# Altium PCB Driver2.PcbDoc
Units mm, origin at the board's own origin, x right, y up, seen from the top; angles counter-clockwise.
Board outline 113.95 x 149.85 mm, 2 copper layers (Top Layer, Bottom Layer); 43 components, 82 nets, 197 pads, 0 vias.
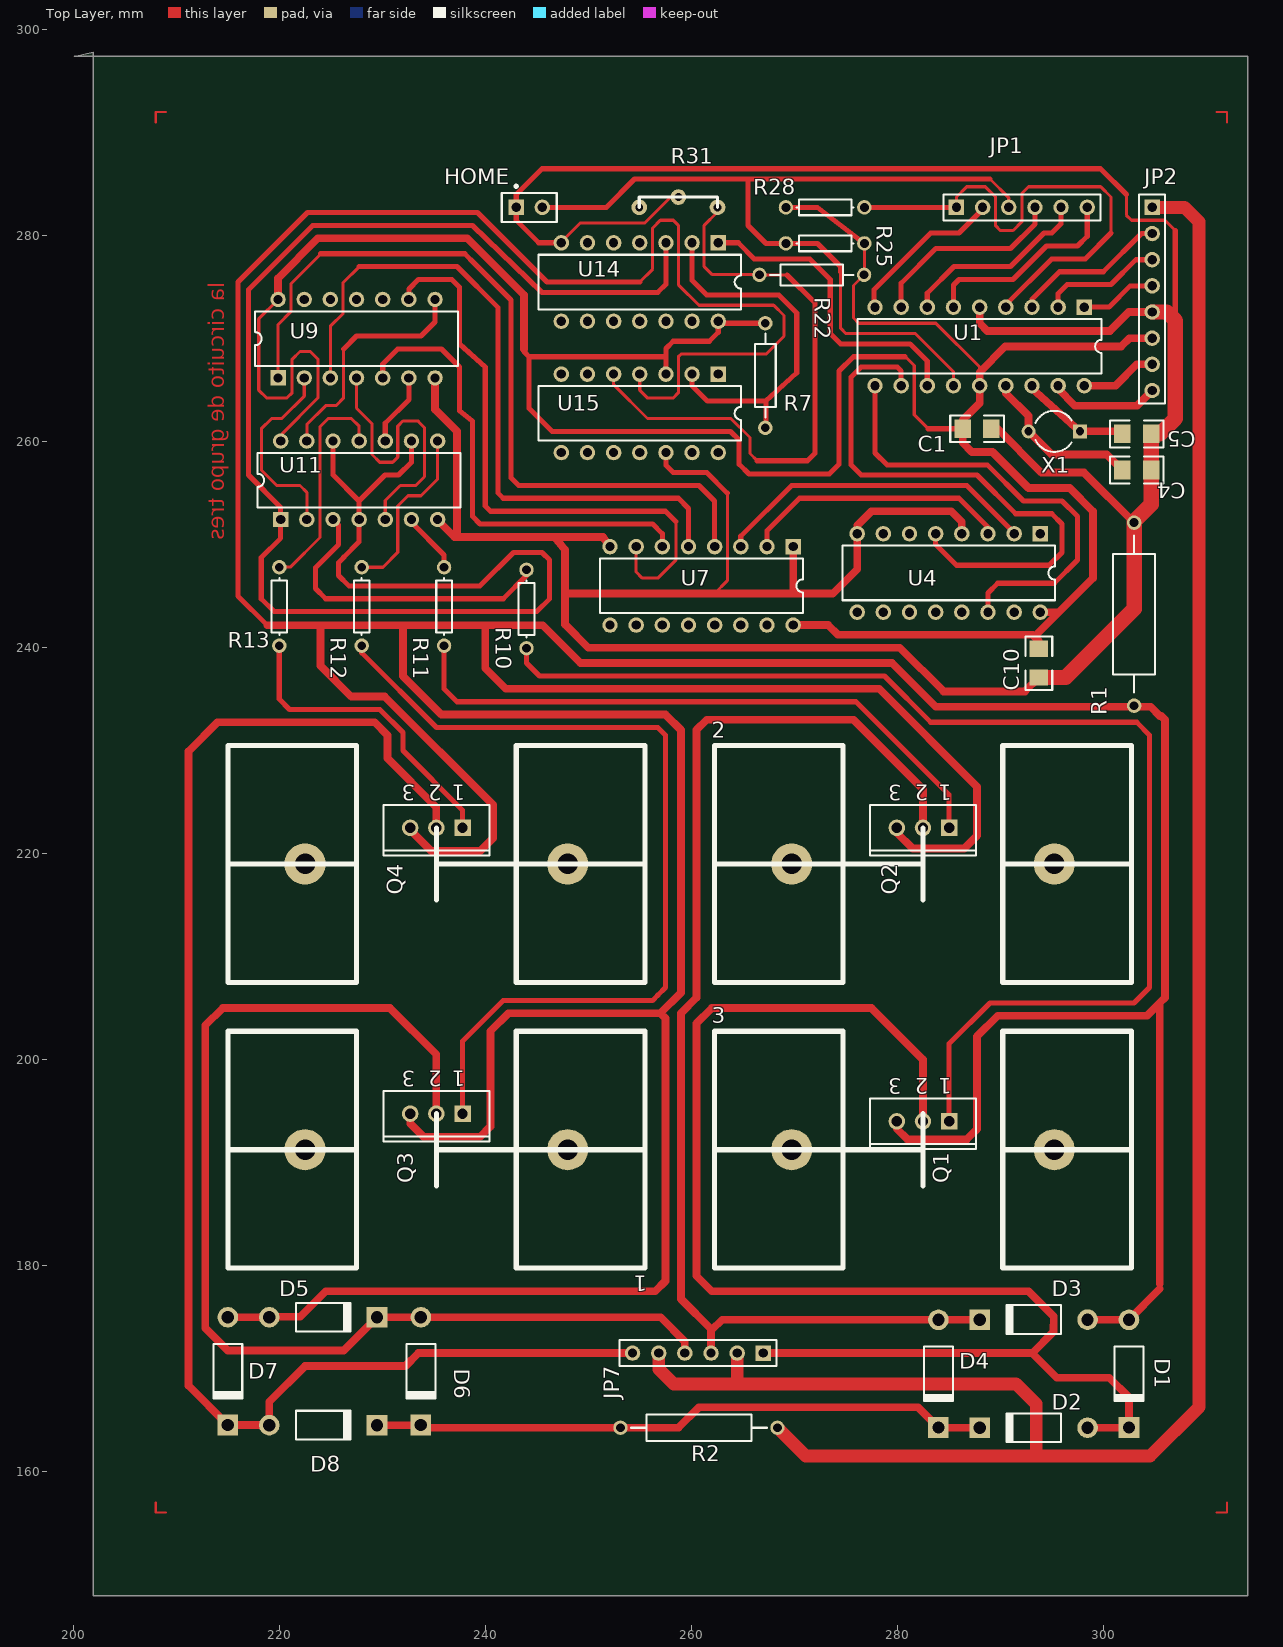
[diagram p0: Top Layer view]
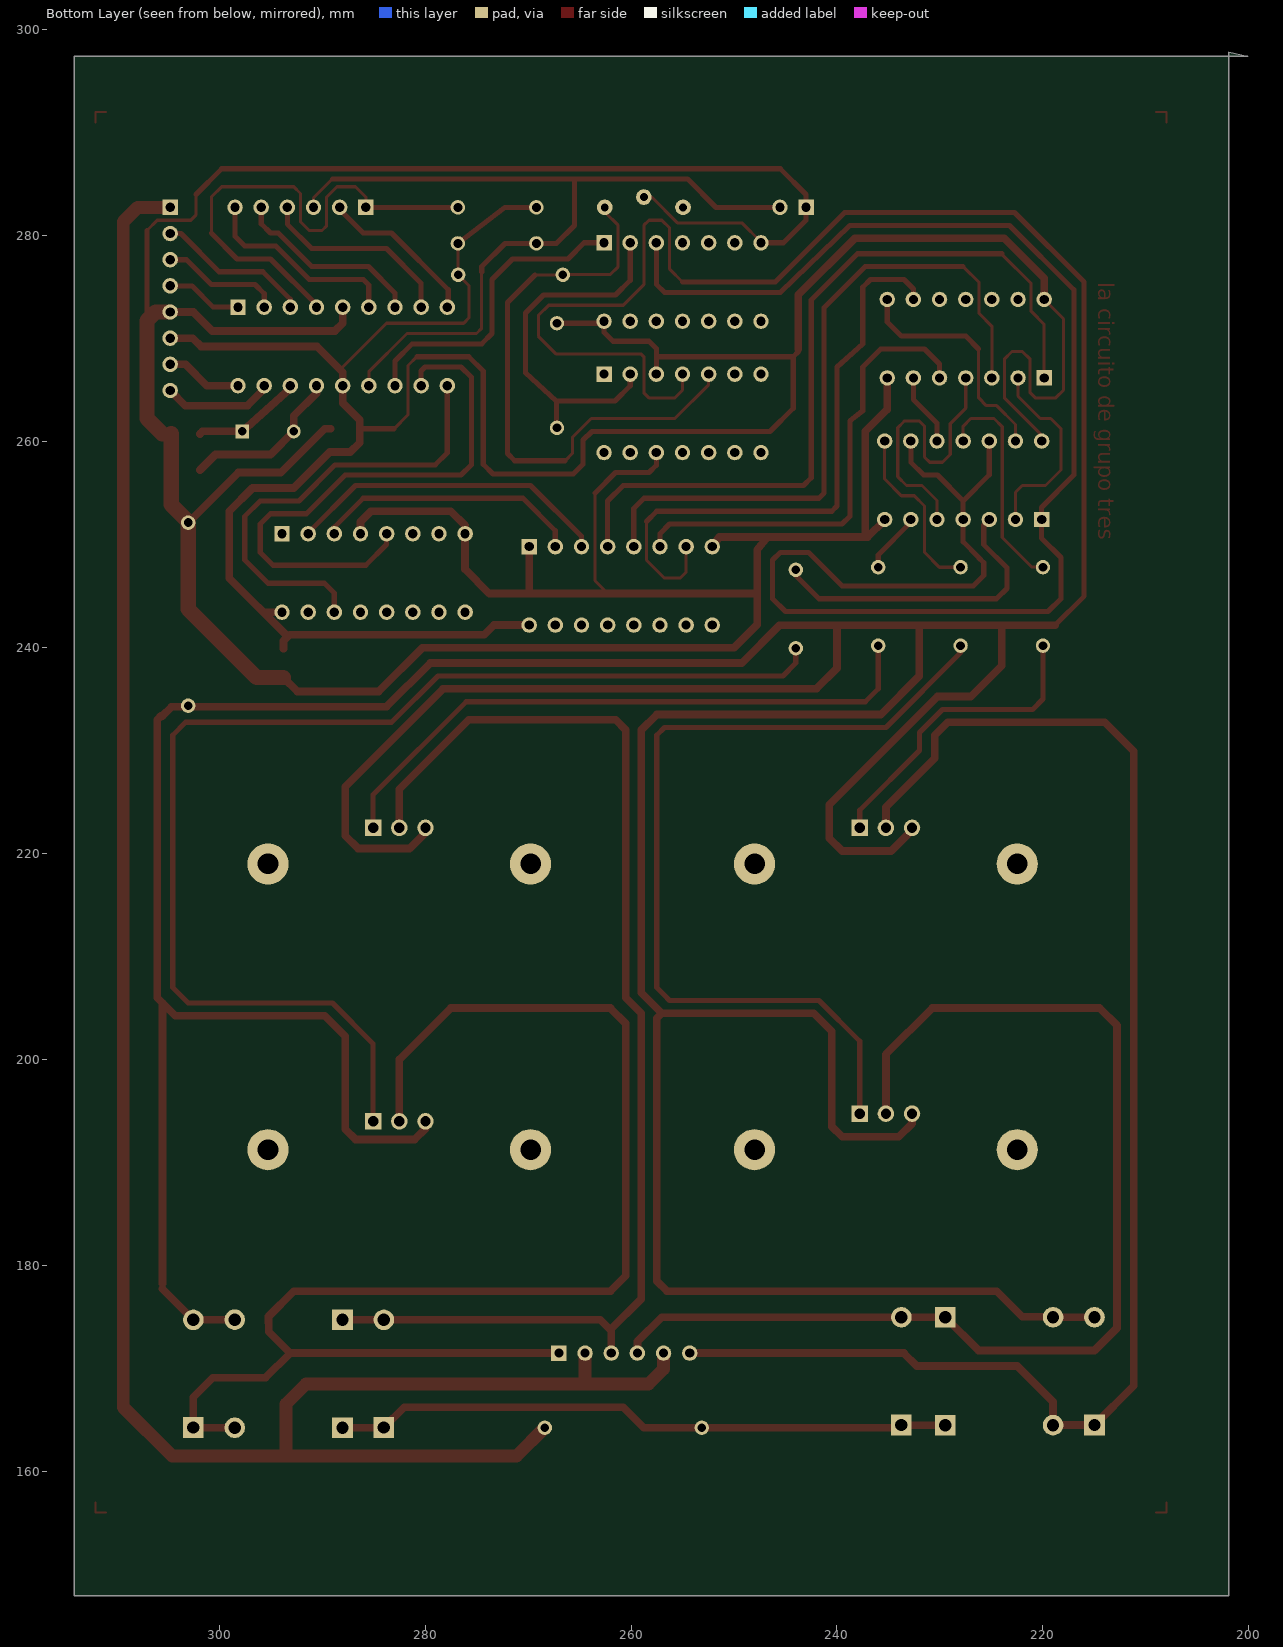
[diagram p1: Bottom Layer view, seen from below]

## Layer stack, top to bottom
Top Layer: signal copper 0.0356
Dielectric: dielectric 0.32, FR-4, Dk 4.8
Bottom Layer: signal copper 0.0356

## Board outline
200.1,297.4 314.05,297.4 314.05,147.95 201.95,147.95 201.95,297.8

## Design rules (kind name [scope] priority, off if disabled: settings)
Clearance [All] p1: gap=0.254
ComponentClearance [All] p1: gap=0.254 collisioncheckmode=0
PolygonConnect [All] p1: connectstyle=Relief reliefconductorwidth=0.254 reliefentries=4 polygonreliefangle="90 Angle"
RoomDefinition Driver [InComponentClass('Driver')] p1: confinementstyle=ConfineIn formatcopy=TRUE outline 225.262,383.686 276.062,383.686 276.062,409.086 225.262,409.086
RoutingLayers [All] p1: top layer=Any bottom layer="Not Used"
RoutingVias [All] p1: holewidth=0.711 width=1.27 viastyle="Through Hole" minholewidth=0.711 minwidth=1.27 maxholewidth=0.711 maxwidth=1.27
SolderMaskExpansion [All] p1: expansion=0.102
TestPointUsage [All] p1: valid=0 allowmultiple=FALSE
Testpoint [All] p1: side=15 testpointundercomponent=TRUE minsize=1.016 maxsize=2.54 preferedsize=1.524 minholesize=0 maxholesize=1.016 preferedholesize=0.813 testpointgrid=0.025 style=1023 order=-539222988
Width [All] p1: maxlimit=25 minlimit=0.254 preferedwidth=0.254 toplayer_prefwidth=0.5 bottomlayer_maxwidth=2.54 minimp=50.000000 maximp=50.000000 favimp=50.000000
16 further rules are at their usual default settings.

## Components (designator, comment, footprint, x,y, rotation, side; value= is the part's Value field where it differs from the comment)
1 "" "Heat Sink" 258,201.25 r180 top
2 "" "Heat Sink" 259.75,209 r0 top
3 "" "Heat Sink" 259.75,181.25 r0 top
C1 "XTAL" C3216-1206#1 287.75,261.25 r0 top
C4 "XTAL" C3216-1206#2 303.25,257.25 r180 top
C5 "XTAL" C3216-1206#2 303.25,260.75 r180 top
C10 "XTAL" C3216-1206#2 293.75,238.5 r90 top
D1 "1N4004" DIO10.46-5.3x2.8 302.5,169.5 r270 top
D2 "1N4004" DIO10.46-5.3x2.8 293.25,164.25 r180 top
D3 "1N4004" DIO10.46-5.3x2.8 293.25,174.75 r180 top
D4 "1N4004" DIO10.46-5.3x2.8 284,169.5 r270 top
D5 "1N4004" DIO10.46-5.3x2.8 224.25,174.98 r0 top
D6 "1N4004" DIO10.46-5.3x2.8 233.75,169.75 r270 top
D7 "1N4004" DIO10.46-5.3x2.8 215,169.75 r270 top
D8 "1N4004" DIO10.46-5.3x2.8 224.25,164.5 r0 top
HOME "" PIN2 243,282.75 r0 top
JP1 "Header 6" HDR1X6 285.75,282.75 r0 top
JP2 "" HDR1X8 304.75,282.75 r270 top
JP7 "Header 6" HDR1X6 267,171.5 r180 top
Q1 "MJE15030" SFM-T3/X1.6V 282.5,194 r180 top
Q2 "MJE15030" SFM-T3/X1.6V 282.5,222.5 r180 top
Q3 "MJE15030" SFM-T3/X1.6V 235.25,194.75 r180 top
Q4 "MJE15030" SFM-T3/X1.6V 235.25,222.5 r180 top
R1 "" AXIAL-0.7 303,243.25 r90 top
R2 "" AXIAL-0.6 260.75,164.25 r0 top
R7 "" AXIAL-0.4 267.19,266.42 r90 top
R10 "1K" AXIAL-0.3 244,243.75 r270 top
R11 "1K" AXIAL-0.3 236,244 r270 top
R12 "1K" AXIAL-0.3 228,244 r270 top (schematic designator R11)
R13 "Res1" AXIAL-0.3 220,244 r90 top
R22 "" AXIAL-0.4 271.7,276.2 r0 top
R25 "1K" AXIAL-0.3 273,279.25 r0 top (schematic designator R10)
R28 "1K" AXIAL-0.3 273,282.75 r0 top (schematic designator R10)
R31 "" "Var res" 258.75,283.75 r0 top
U1 "PIC16C84-04/P" DIP-18 288,269.25 r180 top
U4 "DM74LS191N" DIP-16 285,247.25 r180 top
U7 "SN74LS139AN" DIP-16/X1.5 261,246 r180 top
U9 "SN74LS04N" DIP-14/D19.7 227.5,270 r0 top
U11 "SN74LS08N" DIP-14/D19.7 227.75,256.25 r0 top
U14 "SN74LS08N" DIP-14/D19.7 255,275.5 r180 top
U15 "LM339N" DIP-14/D19.7 255,262.75 r180 top
X1 "" CAPR5-4X5 297.75,261 r180 top
? "" "Heat Sink" 258,229 r180 top

## Footprints (in the part's own frame and the unit in brackets; to place one, negate y for a bottom-side part, rotate by r counter-clockwise, add the part's x,y. Pads: shape width x height; smd on the part's side, far side on the other; paste and mask are expansions set on the pad)
AXIAL-0.3 [mm]
  round 1.4 hole 0.85: 1(-3.81,0) 2(3.81,0)
  silkscreen extent -2.77,-0.76 2.77,0.76
AXIAL-0.4 [mm]
  round 1.4 hole 0.85: 1(-5.08,0) 2(5.08,0)
  silkscreen extent -4.06,-1.02 4.06,1.02
AXIAL-0.6 [mm]
  round 1.4 hole 0.85: 1(-7.62,0) 2(7.62,0)
  silkscreen extent -6.6,-1.27 6.6,1.27
AXIAL-0.7 [mm]
  round 1.4 hole 0.85: 1(-8.89,0) 2(8.89,0)
  silkscreen extent -7.62,-2.03 7.62,2.03
C3216-1206#1 [mm]
  rect 1.6x1.8 smd: 2(1.4,0) C1(-1.4,0)
  silkscreen extent -2.6,-1.3 2.6,1.3
C3216-1206#2 [mm]
  rect 1.6x1.8 smd: 1(-1.4,0) 2(1.4,0)
  silkscreen extent -2.6,-1.3 2.6,1.3
CAPR5-4X5 [mm]
  rect 1.35x1.35 hole 0.8: 1(0,0)
  round 1.35 hole 0.8: 2(5,0)
  silkscreen extent 0.81,-2 4.32,2
DIO10.46-5.3x2.8 [mm]
  round 2 hole 1.2: 1(-5.23,0)
  rect 2x2 hole 1.2: 2(5.23,0)
  silkscreen extent -2.65,-1.4 2.75,1.4
DIP-14/D19.7 [mm]
  rect 1.5x1.5 hole 0.9: 1(-7.62,-3.81)
  round 1.5 hole 0.9: 2(-5.08,-3.81) 3(-2.54,-3.81) 4(0,-3.81) 5(2.54,-3.81) 6(5.08,-3.81) 7(7.62,-3.81) 8(7.62,3.81) 9(5.08,3.81) 10(2.54,3.81) 11(0,3.81) 12(-2.54,3.81) 13(-5.08,3.81) 14(-7.62,3.81)
  silkscreen extent -9.85,-2.65 9.85,2.65
DIP-16 [mm]
  rect 1.5x1.5 hole 0.9: 1(-8.89,-3.81)
  round 1.5 hole 0.9: 2(-6.35,-3.81) 3(-3.81,-3.81) 4(-1.27,-3.81) 5(1.27,-3.81) 6(3.81,-3.81) 7(6.35,-3.81) 8(8.89,-3.81) 9(8.89,3.81) 10(6.35,3.81) 11(3.81,3.81) 12(1.27,3.81) 13(-1.27,3.81) 14(-3.81,3.81) 15(-6.35,3.81) 16(-8.89,3.81)
  silkscreen extent -10.3,-2.65 10.3,2.65
DIP-16/X1.5 [mm]
  rect 1.5x1.5 hole 0.9: 1(-8.89,-3.81)
  round 1.5 hole 0.9: 2(-6.35,-3.81) 3(-3.81,-3.81) 4(-1.27,-3.81) 5(1.27,-3.81) 6(3.81,-3.81) 7(6.35,-3.81) 8(8.89,-3.81) 9(8.89,3.81) 10(6.35,3.81) 11(3.81,3.81) 12(1.27,3.81) 13(-1.27,3.81) 14(-3.81,3.81) 15(-6.35,3.81) 16(-8.89,3.81)
  silkscreen extent -9.85,-2.65 9.85,2.65
DIP-18 [mm]
  rect 1.5x1.5 hole 0.9: 1(-10.16,-3.81)
  round 1.5 hole 0.9: 2(-7.62,-3.81) 3(-5.08,-3.81) 4(-2.54,-3.81) 5(0,-3.81) 6(2.54,-3.81) 7(5.08,-3.81) 8(7.62,-3.81) 9(10.16,-3.81) 10(10.16,3.81) 11(7.62,3.81) 12(5.08,3.81) 13(2.54,3.81) 14(0,3.81) 15(-2.54,3.81) 16(-5.08,3.81) 17(-7.62,3.81) 18(-10.16,3.81)
  silkscreen extent -11.85,-2.65 11.85,2.65
HDR1X6 [mm]
  rect 1.5x1.5 hole 0.9: 1(0,0)
  round 1.5 hole 0.9: 2(2.54,0) 3(5.08,0) 4(7.62,0) 5(10.16,0) 6(12.7,0)
  silkscreen extent -1.27,-1.27 13.97,1.27
HDR1X8 [mm]
  rect 1.5x1.5 hole 0.9: 1(0,0)
  round 1.5 hole 0.9: 2(2.54,0) 3(5.08,0) 4(7.62,0) 5(10.16,0) 6(12.7,0) 7(15.24,0) 8(17.78,0)
  silkscreen extent -1.27,-1.27 19.05,1.27
"Heat Sink" [mm]
  round 4 hole 2: 0(35.5,10) 2(10,10)
  silkscreen extent 2.5,-1.5 43,21.5
PIN2 [mm]
  rect 1.5x1.5 hole 0.9: 1(0,0)
  round 1.5 hole 0.9: 2(2.54,0)
  silkscreen extent -1.4,-1.4 3.94,2.17
SFM-T3/X1.6V [mm]
  rect 1.6x1.6 hole 1: 1(-2.54,0)
  round 1.6 hole 1: 2(0,0) 3(2.54,0)
  silkscreen extent -5.15,-2.2 5.15,2.7
"Var res" [mil]
  round 60 hole 30: 0(0,0) 1(-149.61,-39.37) 2(149.61,-39.37)
  silkscreen extent -150,-39 150,0

## Part data
D1 D2 D3 D4 D5 D6 D7 D8: "1.0 Ampere General Purpose Rectifier"
JP1 JP7: "Header, 6-Pin"
Q1 Q2 Q3 Q4: "Complementary Silicon Plastic Power Transistor"
R10 R25 R28: library part Res1, "Resistor"
R11 R12: library part res1, "Resistor"
R13: "Resistor"
U1: "EPROM-Based 8-Bit CMOS Microcontroller"
U4: "Synchronous 4-Bit Up/Down Counter with Mode Control"
U7: "Dual 2-Line to 4-Line Decoder / Demultiplexer"
U9: "Hex Inverter"
U11 U14: "Quadruple 2-Input Positive-AND Gate"
U15: "Quad Single-Supply Comparator"

## Nets (pads, with @x,y where several pads share a name; then routed paths per layer and width w, separated by ;. In a path a pad name is that pad's centre, name@x,y a point inside that pad or via, vN(x,y) a via of type N, cw(c..) or ccw(c..) an arc to the next point about the centre after c; other vN are vias at no path point)
+5V: 
+5V: 
+5V: 
+5V: 
+5V: 
+5V: 
+5V: 
+5V: 
+12V: JP2.1 JP7.2 JP7.5 R2.2 | length 211.9
  Top Layer w1.25: JP7.5 256.84,169.96 258.3,168.5 291.55,168.5 293.5,166.55 293.5,161.5 ; 264.46,168.51 JP7.2 ; R2.2 271.12,161.5 304.55,161.5 309.3,166.25 309.3,281.35 307.9,282.75 JP2.1
+12V: 
+12V: 
+12V: 
+12V: 
+12V: 
+12V: 
+12V: 
+12V: 
"CLOCK PIC1": JP1.6 U1.6 | length 19.9
  Top Layer w0.5: U1.6 285.46,275.21 286,275.75 291.25,275.75 294.5,279 297.5,279 298.45,279.95 JP1.6
"COIL OFF": U1.12 U14.1 | length 30.5
  Top Layer w0.5: U14.1 264.56,279.31 266.12,277.75 271.5,277.75 273.5,275.75 273.5,270.5 274.5,269.5 281.25,269.5 282.92,267.83 U1.12
"DATA IN PIC1": JP1.5 U1.7 | length 18.8
  Top Layer w0.5: U1.7 282.92,274.42 285.5,277 291,277 294.25,280.25 295,280.25 295.91,281.16 JP1.5 ; JP1.5@295.83,282.83 JP1.5@295.91,282.91
"DATA OUT PIC1": JP1.2 U1.9 | length 15.5
  Top Layer w0.5: U1.9 277.75,273.15 277.75,274.75 283.25,280.25 286,280.25 JP1.2@288.29,282.54
GND: C1.2 C4.1 C5.1 C10.1 HOME.1 JP2.5 R1.2 R31.0 U1.5 U4.4 U4.8 U7.1 U7.8 U9.7 U11.7 U14.7 U15.12 | length 341.6
  Top Layer w0.3: U11.7 U11.7@235.37,252.62 ; U14.7 247.38,279.38 249.25,281.25 255.5,281.25 258,283.75 R31.0 ; 262.25,245.25 263.5,246.5 263.5,255 ; 302.25,284 302.25,282 302.75,281.5 306,281.5 307,280.5
  Top Layer w0.5: U11.7@235.37,252.38 U11.7 ; U14.7 245.19,279.31 243,281.5 243,284 245.5,286.5 299.75,286.5 302.25,284 ; U15.12 257.54,257.71 258.25,257 261.5,257 263.5,255 ; 307,271.75 307,280.5
  Top Layer w0.75: U9.7 235.12,263.13 237.25,261 237.25,250.75 ; U11.7@235.37,252.38 237,250.75 246.5,250.75 ; 247.75,245.25 273.75,245.25 276.11,247.61 276.11,251.86 277.5,253.25 285.25,253.25 286.27,252.23 U4.4 ; U7.8 251.42,250.75 246.75,250.75 247.75,249.5 247.75,242.25 250,240 280.25,240 284.5,235.75 292.4,235.75 C10.1 ; 269.89,245.36 U7.1 ; U1.5 288,271.5 288.75,270.75 300.65,270.75 302.49,272.59 JP2.5 ; C1.2 289.75,261.25 294,257 298.14,257 R1.2 R1.2@303.14,252.14 ; C5.1 305.5,260.75
  Top Layer w1.5: C10.1 296.35,237.1 303,243.75 303,252.25 304.65,253.9 C5.1 ; JP2.5 306.16,272.59 307,271.75 307,262.25 305.5,260.75
"HOME PIC1": HOME.2 JP1.3 R25.1 U1.13 | length 84.2
  Top Layer w0.3: 265.25,285.5 265.5,285.25 ; 274.5,276.5 274.5,271 275,270.5 281.75,270.5 285.46,266.79 U1.13 ; 289,285.5 290.83,283.67 JP1.3
  Top Layer w0.5: HOME.2 251.75,282.75 254.5,285.5 289,285.5 ; 265.5,285.25 265.5,281 267.25,279.25 270,279.25 ; R25.1@269.25,279.25 272.25,279.25 274.5,277 274.5,276.5
NetB1A_1: D3.2 D4.1 JP7.3 Q2.2 | length 117.8
  Top Layer w0.75: JP7.3 261.92,173.67 262,173.75 ; Q2.2 282.5,226.25 275.75,233 261.5,233 260.5,232 260.5,206 259,204.5 259,176.75 262,173.75 ; D4.1 D4.1@284,174.75 ; D3.2 D4.1@284,174.75 ; 262,173.75 263,174.75 D4.1@284,174.75
NetB1A_2: D1.2 D2.1 JP7.1 Q1.2 | length 140.2
  Top Layer w0.75: JP7.1 293.1,171.5 ; Q1.2 282.5,200 277.5,205 262,205 260.5,203.5 260.5,179 262,177.5 292.75,177.5 295.2,175.05 295.175,173.575 293.1,171.5 295.5,169.1 300.6,169.1 302.5,167.2 D1.2 302.48,164.25 D2.1
NetB1B_1: D7.2 D8.1 JP7.6 Q4.2 | length 142.5
  Top Layer w0.75: Q4.2 235.25,224.5 230.5,229.25 230.5,231.5 229.25,232.75 214,232.75 211.188,229.938 211.188,168.332 D7.2 219,164.52 D8.1 219.02,166.77 222.5,170.25 232.25,170.25 233.5,171.5 JP7.6
NetB1B_2: D5.2 D6.1 JP7.4 Q3.2 | length 111
  Top Layer w0.75: Q3.2 235.25,200.5 230.75,205 214.5,205 212.815,203.315 212.815,173.935 215,171.75 226.25,171.75 D5.2 D6.1 257.02,174.98 259.38,172.62 JP7.4
NetC4_2: C4.2 U1.15 X1.2 | length 16
  Top Layer w0.75: U1.15 290.54,264.71 292.75,262.5 X1.2 295,258.75 300.35,258.75 C4.2
NetC5_2: C5.2 U1.16 X1.1 | length 10.7
  Top Layer w0.5: U1.16@293.08,265.42 U1.16
  Top Layer w0.75: U1.16@293.08,265.42 293.08,265.17 X1.1 301.6,261 C5.2
NetD1_1: D1.1 D3.1 D5.1 D7.1 Q1.3 Q2.3 Q3.3 Q4.3 R1.1 U15.4 | length 597.2
  Top Layer w0.3: U15.4 255,265 255.776,264.224 ; 255,275.5 256.25,276.75 256.25,280.75 257,281.5 258.25,281.5 258.75,281 258.75,275.25 260.75,273.25 268,273.25 269,272.25 269,270.25 267.25,268.5 259,268.5 258.75,268.25 258.75,264.75 258.224,264.224 255.799,264.224
  Top Layer w0.5: 218.828,242.172 216,245 216,275.5 222.75,282.25 239.25,282.25 246,275.5 255,275.5
  Top Layer w0.75: D7.1 D5.1 219.02,175.02 222.02,175.02 224.5,177.5 256.5,177.5 257.5,178.5 257.5,204 257,204.5 ; 218.828,242.172 245.578,242.172 249.25,238.5 279.5,238.5 283.75,234.25 304.61,234.25 305.5,233.36 305.64,233.36 306,233 306,206 305.5,205.5 ; 224,242.172 224,238.25 227,235.25 230.25,235.25 240.75,224.75 240.75,221.5 239.5,220.25 234.75,220.25 232.71,222.29 Q4.3 ; 232,242.172 232,237.25 235.75,233.5 257.5,233.5 259,232 259,206.5 257,204.5 ; Q3.3 232.71,193.79 234,192.5 239.5,192.5 240.5,193.5 240.5,202.75 242.25,204.5 257,204.5 ; 240,242.172 240,238 242,236 278.25,236 287.75,226.5 287.75,221.75 286.5,220.5 281.5,220.5 279.96,222.04 Q2.3 ; Q1.3@279.96,193.29 281,192.25 286.75,192.25 287.75,193.25 287.75,202.25 289.75,204.25 304.25,204.25 305.5,205.5 ; D3.1 D1.1@302.48,174.75 ; D1.1 302.5,174.75 305.5,177.75 ; 305.5,178.25 305.5,205.5
NetD2_2: D2.2 D4.2 D6.2 D8.2 R2.1 | length 60.7
  Top Layer w0.75: D8.2 233.73,164.5 233.98,164.25 R2.1 ; R2.1@252.88,164.5 R2.1 ; D2.2 284.02,164.25 D4.2 282.02,166.25 260.75,166.25 258.75,164.25 R2.1
NetJP4_1: JP2.2 U1.3 | length 15.1
  Top Layer w0.5: U1.3 293.08,273.83 295.75,276.5 300,276.5 303.71,280.21 JP2.2
NetJP4_2: JP2.3 U1.2 | length 11.8
  Top Layer w0.5: U1.2 295.62,274.37 296.5,275.25 300.75,275.25 303.17,277.67 JP2.3
NetJP4_3: JP2.4 U1.1 | length 7.4
  Top Layer w0.5: U1.1 300.56,273.06 302.63,275.13 JP2.4
NetJP4_4: JP2.7 U1.18 | length 7.4
  Top Layer w0.75: U1.18 301.19,265.44 303.26,267.51 JP2.7
NetJP4_5: JP2.8 U1.17 | length 10.7
  Top Layer w0.5: U1.17@295.62,265.38 U1.17
  Top Layer w0.75: U1.17@295.62,265.38 295.62,265.13 297.25,263.5 303.28,263.5 JP2.8
NetQ1_1: Q1.1 R10.2 | length 118.6
  Top Layer w0.5: R10.2 244,238.5 245.25,237.25 278.75,237.25 283.25,232.75 303.25,232.75 304.5,231.5 304.5,207 303,205.5 289,205.5 285.04,201.54 Q1.1
NetQ1_2: 
NetQ2_1: Q2.1 R11.2 | length 60.7
  Top Layer w0.5: R11.2 236,236 237.25,234.75 276,234.75 285.04,225.71 Q2.1
NetQ2_2: 
NetQ3_1: Q3.1 R12.2 | length 86.9
  Top Layer w0.5: R12.2 228,239.5 235.25,232.25 256.75,232.25 257.5,231.5 257.5,207 256.75,206.25 256.25,205.75 241.75,205.75 237.79,201.79 Q3.1
NetQ3_2: 
NetQ4_1: Q4.1 R13.1 | length 30.2
  Top Layer w0.5: R13.1 220,235 221,234 229.75,234 232,231.75 232,230 237.79,224.21 Q4.1
NetQ4_2: 
NetQ6_2: 
NetQ7_2: 
NetQ8_2: 
NetQ10_2: 
NetQ11_2: 
NetQ12_2: 
NetR7_1: R7.1 U14.2 U15.2 | length 36.6
  Top Layer w0.5: U15.2 260.08,265.42 261.56,263.94 267.25,263.94 ; U14.2 260.08,275.67 261.5,274.25 268.5,274.25 270.25,272.5 270.25,266.69 267.25,263.94 ; R7.1 267.25,261.4 267.25,263.94
NetR10_1: R10.1 U11.3 | length 30.3
  Top Layer w0.3: R10.1@244,247 R10.1
  Top Layer w0.5: U11.3 225.75,251.9 225.75,250 223.5,247.75 223.5,245.75 224.5,244.75 241.75,244.75 R10.1@244,247
NetR11_1: R11.1 U11.6 | length 6
  Top Layer w0.3: R11.1@235.94,247.81 R11.1
  Top Layer w0.5: U11.6 232.83,252.17 236,249 R11.1
NetR12_1: R12.1 U11.8 | length 17.2
  Top Layer w0.3: R12.1 230.06,247.81 231.5,249.25 231.5,253.75 232.5,254.75 233.75,254.75 235.37,256.37 U11.8
NetR13_2: R13.2 U11.11 | length 21.8
  Top Layer w0.3: R13.2@219.94,247.81 221.06,247.81 223.95,250.7 223.95,261.45 224.75,262.25 227,262.25 227.75,261.5 U11.11
NetR22_1: 
NetR22_1: R22.1 R31.2 U15.5 | length 57.9
  Top Layer w0.3: U15.5 252.46,265.54 255.75,262.25 263.85,262.25 265.7,260.4 265.7,258.85 266.4,258.15 ; R31.2@262.5,282.7 262.5,282.25 261.25,281 261.25,277 262,276.25 266.57,276.25 266.63,276.19 269.31,276.19
  Top Layer w0.5: 266.4,258.15 271.3,258.15 272,258.85 272,273.5 269.31,276.19
NetR25_1: 
NetR26_1: 
NetR27_1: 
NetR28_1: JP1.1 R28.2 U1.4 | length 49.4
  Top Layer w0.3: JP1.1 285.75,283.75 286.75,284.75 288.55,284.75 289.55,283.75 289.55,280.95 290,280.5 291.25,280.5 292.1,281.35 292.1,284.1 292.75,284.75 299.75,284.75 300.75,283.75 300.75,280.25
  Top Layer w0.5: R28.2 JP1.1 ; U1.4 290.54,273.29 295,277.75 298.25,277.75 300.75,280.25
  Top Layer w0.75: U1.4 U1.4@290.56,273.06
NetU1_10: U1.10 U4.14 | length 44.1
  Top Layer w0.5: 277.84,264.69 277.84,258.91 279,257.75 288.75,257.75 292.25,254.25 296,254.25 297.5,252.75 297.5,248.5 295.25,246.25 289.75,246.25 288.81,245.31 U4.14
NetU1_11: U1.11 U4.5 | length 55.7
  Top Layer w0.3: U4.5@283.73,251.52 U4.5@283.73,251.56
  Top Layer w0.5: U1.11 280.38,266.87 280,267.25 276.5,267.25 275.5,266.25 275.5,257.75 276.5,256.75 287.75,256.75 291.5,253 295,253 296,252 296,249.25 294.75,248 285.75,248 283.73,250.02 U4.5
NetU4_2: U4.2 U7.3 | length 31.7
  Top Layer w0.3: U7.3 U7.3@265.06,249.81
  Top Layer w0.5: U7.3 264.81,250.81 269.75,255.75 286.75,255.75 U4.2@291.35,251.15
NetU4_3: U4.3 U7.2 | length 26.4
  Top Layer w0.3: U7.2 U7.2@267.35,250.1
  Top Layer w0.5: U7.2 267.35,251.35 270.5,254.5 286,254.5 288.81,251.69 U4.3
NetU7_4: U7.4 U9.1 | length 76.5
  Top Layer w0.3: U9.1 219.88,271.38 221.15,272.65 221.15,275.35 224,278.2 224,278.25
  Top Layer w0.5: 224,278.25 238,278.25 239,277.25 242.5,273.75 242.5,256.5 243.25,255.75 260.75,255.75 262.27,254.23 U7.4
NetU7_5: U7.5 U9.3 | length 68
  Top Layer w0.3: U9.3 224.96,271.21 226.2,272.45 226.2,275.45 227.75,277 ; U7.5 U7.5@259.75,249.83
  Top Layer w0.5: 227.75,277 237.25,277 241.25,273 241.25,255 241.75,254.5 258.75,254.5 259.73,253.52 U7.5
NetU7_6: U7.6 U9.5 | length 45.6
  Top Layer w0.5: U9.5 230.04,267.54 231.5,269 235.75,269 237.5,267.25 237.5,263 238.75,262 238.75,252.75 239.5,252 256.25,252 257.19,251.06 U7.6
NetU7_7: U7.7 U9.9 | length 58.9
  Top Layer w0.3: U7.7 254.65,247.35 255.25,246.75 256.75,246.75 258.5,248.5 258.5,252.25
  Top Layer w0.5: U9.9 232.58,274.83 233.5,275.75 236.75,275.75 237.5,275 ; 237.5,274.75 237.5,269.5 240,267.25 240,253.75 240.5,253.25 257.5,253.25 258.5,252.25
NetU9_2: U9.2 U11.2 | length 19.2
  Top Layer w0.3: U9.2 222.42,264.42 220.25,262.25 219.25,262.25 218.25,261.25 218.25,257.25 219.75,255.75 222,255.75 222.67,255.08 U11.2
NetU9_4: U9.4 U11.5 | length 28.6
  Top Layer w0.3: U9.4 227.5,263.25 229,261.75 229,258.75 229.75,258 231,258 231.5,258.5 231.5,261.5 232,262 233.5,262 233.5,261.95 234.1,261.35 234.1,256.6 233.25,255.75 231.75,255.75 230.29,254.29 U11.5
NetU9_6: U9.6 U11.10 | length 7.4
  Top Layer w0.3: U11.10@229.94,260.06 U11.10
  Top Layer w0.5: U11.10 230.29,261.79 232.58,264.08 U9.6
NetU9_8: U9.8 U11.13 | length 23.2
  Top Layer w0.3: U11.13 222.67,261.67 224.5,263.5 225.5,263.5 226.25,264.25 226.25,269
  Top Layer w0.5: 226.25,269 227.5,270.25 233.75,270.25 235.12,271.62 U9.8
NetU11_1: U11.1 U11.4 U11.9 U11.12 U14.3 | length 161.2
  Top Layer w0.5: U11.12 225.21,256.79 227.75,254.25 ; U11.9 232.83,258 231.58,256.75 230.25,256.75 227.75,254.25 ; U14.3 257.54,275.29 256.75,274.5 245.5,274.5 238.75,281 223.25,281 217,274.75 217,256.75 220.13,253.62 220.13,250.63 218.25,248.75 218.25,244.75 219.5,243.5 245,243.5 246.25,244.75 246.25,248.5 245.5,249.25 242.75,249.25 239.5,246 226.75,246 225.75,247 225.75,248.25 226.25,248.75 226.25,248.783 227.75,250.283 U11.4 227.75,254.25
"RESET PIC1": 
"STATUS PIC1": JP1.4 U1.8 | length 19.3
  Top Layer w0.5: U1.8 280.38,275.38 283.75,278.75 291,278.75 293.37,281.12 JP1.4
VCC: 
VDD: R22.2 R25.2 R28.1 | length 16.7
  Top Layer w0.3: 275.75,272 275.75,275.17 R22.2 ; R22.2@276.81,276 R25.2
  Top Layer w0.5: R28.1 272.25,282.75 R25.2
VDD: 
VDD: 
VDD: 
VDD: C1.C1 C10.2 JP2.6 R7.2 U1.14 U4.16 U7.16 U9.14 U11.14 U14.14 U15.3 | length 258.1
  Top Layer w0.3: U9.14@219.56,273.81 U9.14@219.56,273.94 ; U9.14 218,271.93 218,265 218.75,264.25 220.75,264.25 221.25,264.75 221.25,268 222,268.75 223,268.75 223.75,268 223.75,264.25 220.13,260.63 U11.14 ; U7.16@269.89,241.86 U7.16 ; 275.75,272 276.25,271.5 283.75,271.5 288,267.25 288,266.75 ; 280.75,268.25 280.8,268.25 281.65,267.4 281.65,262.6 283,261.25 ; U4.16@293.89,243.19 U4.16@293.89,243.94
  Top Layer w0.5: 243.75,269 243.75,268.75 244.25,268.25 ; 257.29,268.25 244.25,268.25 ; U15.3@257.81,266.56 U15.3 257.54,269.04 258.25,269.75 261.75,269.75 262.62,270.62 U14.14 ; U14.14@262.62,271.5 R7.2 ; U7.16@269.89,242.11 U7.16 ; 280.75,268.25 275.75,268.25 274.35,266.85 274.35,257.8 273.4,256.85 265.6,256.85 264.65,257.8 264.65,260.15 263.8,261 246.5,261 244.25,263.25 244.25,268.25 ; 283,261.25 C1.C1 ; U4.16@293.89,243.19 U4.16@293.89,243.69
  Top Layer w0.75: U9.14 219.88,275.88 223.75,279.75 238.25,279.75 243.75,274.25 243.75,269 ; U7.16 273.31,242.19 274.25,241.25 293.14,241.25 293.32,241.07 293.75,240.64 C10.2 ; 293.5,241.25 299,246.75 299,253.25 296.75,255.5 292.75,255.5 289.25,259 287.25,259 286.35,259.9 C1.C1 286.35,262.1 288,263.75 U1.14 288,266.75 290.5,269.25 301.75,269.25 302.55,270.05 JP2.6 ; U4.16 295.69,243.44
pads on no net: 1.0 1.2 2.0 2.2 3.0 3.2 ?.0 ?.2 R31.1 U4.1 U4.6 U4.7 U4.9 U4.10 U4.11 U4.12 U4.13 U4.15 U7.9 U7.10 U7.11 U7.12 U7.13 U7.14 U7.15 U9.10 U9.11 U9.12 U9.13 U14.4 U14.5 U14.6 U14.8 U14.9 U14.10 U14.11 U14.12 U14.13 U15.1 U15.6 U15.7 U15.8 U15.9 U15.10 U15.11 U15.13 U15.14
copper on no net: | length 8
  Top Layer w0.2: 208,157 208,156 209,156 ; 208,291 208,292 209,292 ; 311,156 312,156 312,157 ; 311,292 312,292 312,291

## Other copper
Top Layer:
  text "la circuito de grupo tres" at 214.65,275.5 h1.52 r90

## Text inside footprints (layer, text, board x,y; h text height)
Q1: Top Overlay "3" at 280.46,198.175 h1.5 r180; Top Overlay "2" at 283,198.175 h1.5 r180; Top Overlay "1" at 285.29,198.175 h1.5 r180
Q2: Top Overlay "1" at 285.29,226.675 h1.5 r180; Top Overlay "2" at 283,226.675 h1.5 r180; Top Overlay "3" at 280.46,226.675 h1.5 r180
Q3: Top Overlay "1" at 238.04,198.925 h1.5 r180; Top Overlay "2" at 235.75,198.925 h1.5 r180; Top Overlay "3" at 233.21,198.925 h1.5 r180
Q4: Top Overlay "1" at 238.04,226.675 h1.5 r180; Top Overlay "2" at 235.75,226.675 h1.5 r180; Top Overlay "3" at 233.21,226.675 h1.5 r180